# EAGLE board Cansat2019_1516_PayloadB_v6 (EAGLE 7.3.0)
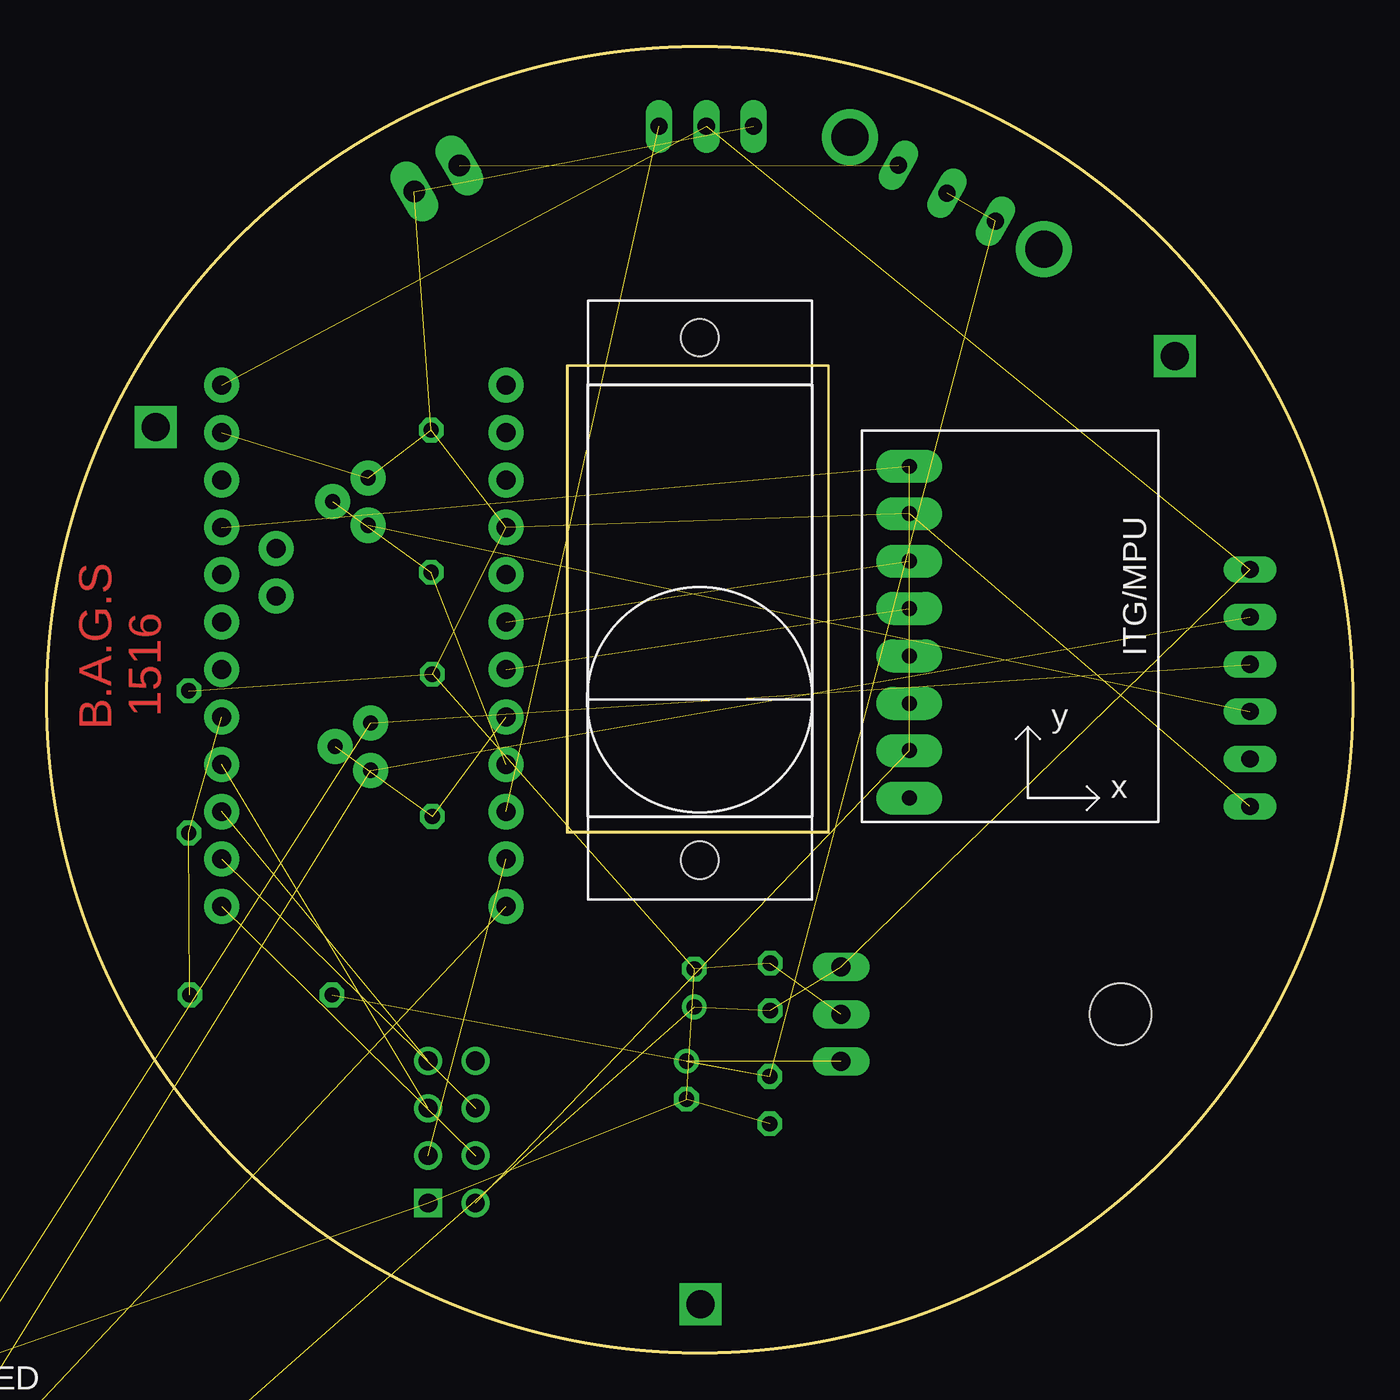
[diagram p0: board, top side]
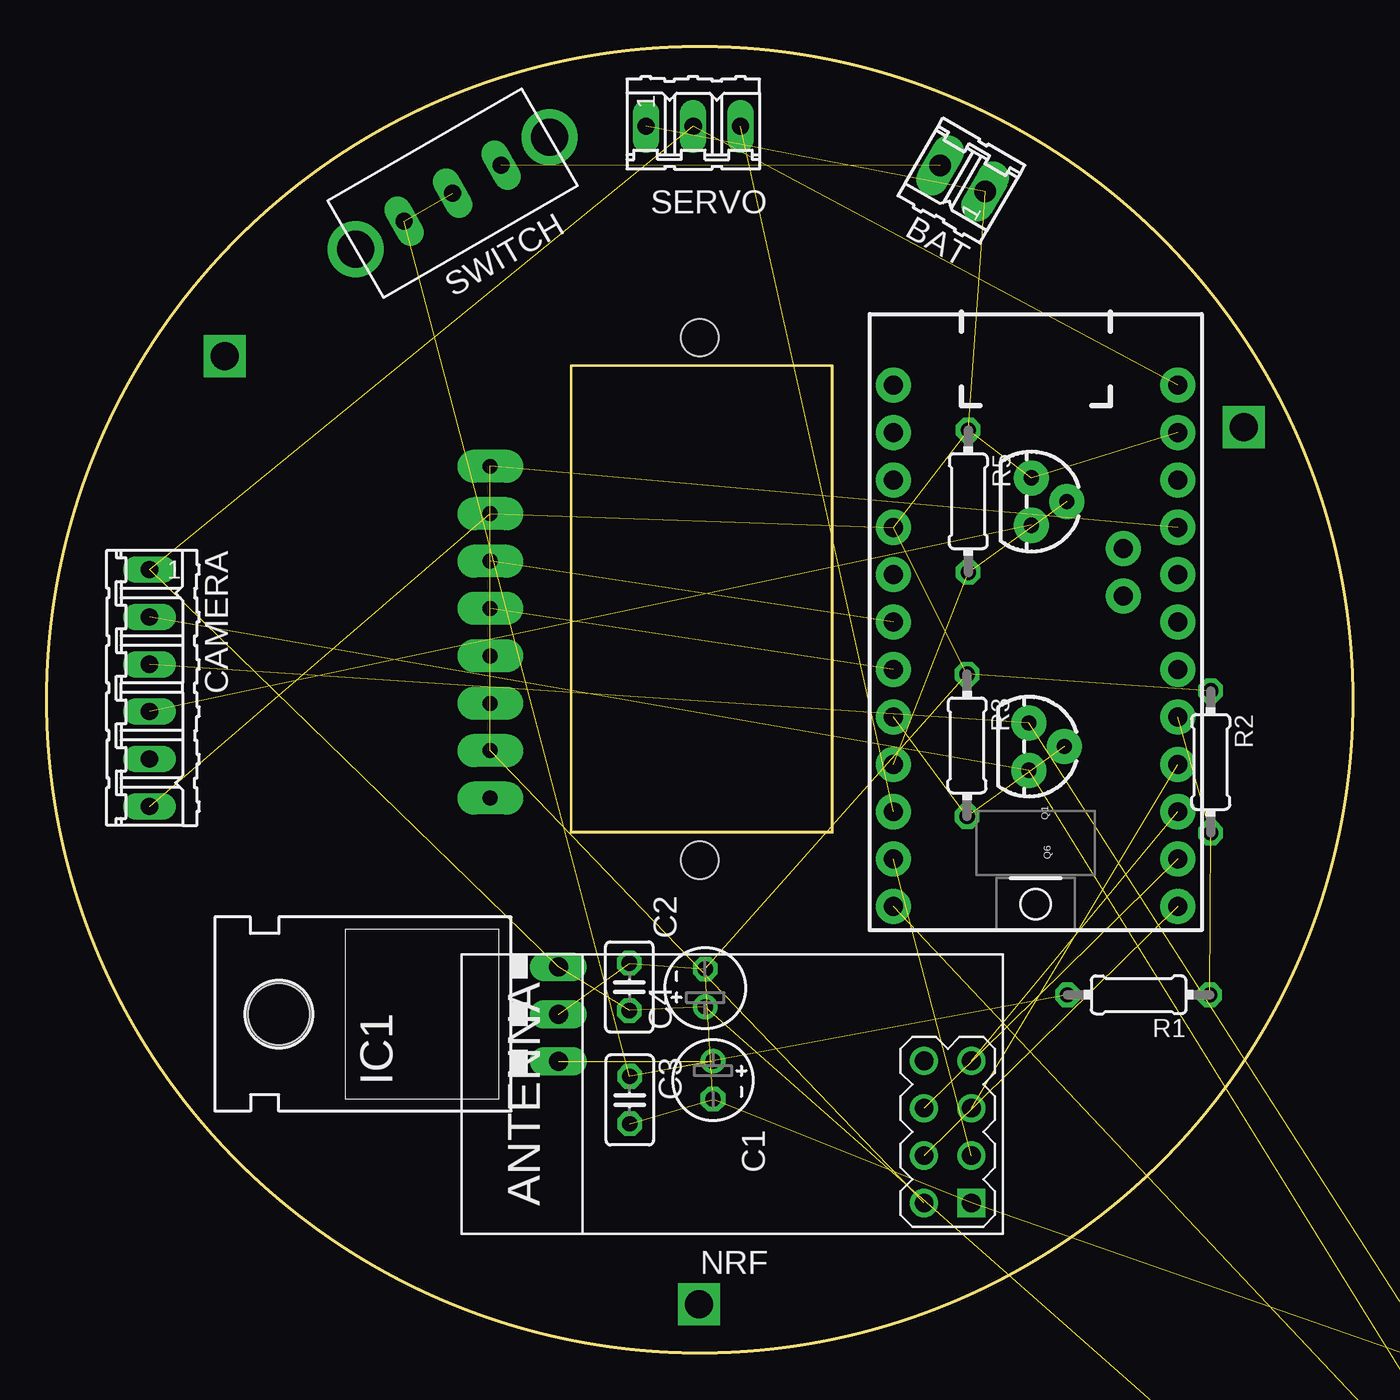
[diagram p1: board, bottom side, seen from below]

Size 70 x 70 mm. Coordinates in mm from the lower left corner, seen from the top.
Outline: circle at 35,35 radius 35
Copper layers (1*16): Top 0.035mm / dielectric 1.5mm / Bottom 0.035mm
Design rules "default": minimum track width 10mil, minimum drill 24mil, track to track 8mil, track to pad 8mil, pad to pad 8mil, via to via 8mil, smd to smd 8mil, copper to edge 40mil, drill to drill 8mil, minimum pad ring 10mil, minimum via ring 8mil, stop-mask expansion 4mil, vias tented up to drill 0mil, thermal gap 10mil
Net classes: 0 default: width 0.305 mm; 1 power: width 0.61 mm, clearance 0.305 mm; 2 power_main: width 0.813 mm, clearance 0.356 mm
Milling: area 27.9,27.9 to 41.9,52.9

## Footprints (pad centres in the part's own frame; a part is rotated, then mirrored left to right if it is on the bottom)
02P = drill 1.143 long: 1 -1.397,0; 2 1.397,0
E2-4 = drill 0.813 pad 1.27: + -1.016,0 | drill 0.813 pad 1.27 octagon: - 1.016,0
C025-025X050 = drill 0.813 octagon: 1 -1.27,0; 2 1.27,0
06P = drill 0.914 long: 1 -6.35,0; 2 -3.81,0; 3 -1.27,0; 4 1.27,0; 5 3.81,0; 6 6.35,0
LED3MM = drill 0.813 pad 1.676 octagon: A -1.27,0; K 1.27,0
TO-220-ALT = drill 1.016 long: GND 0,-3.81; IN -2.54,-3.81; OUT 2.54,-3.81 | hole 3.302: 0,11.176
GY-521 = drill 0.8 pad 1.778 long: ADO -8.89,-6.35; GND -8.89,6.35; INT -8.89,-8.89; SCL -8.89,3.81; SDA -8.89,1.27; VCC -8.89,8.89; XCL -8.89,-3.81; XDA -8.89,-1.27
WIRELESS-NRF24L01 = drill 1 square: 1 -12.7,6.35 | drill 1: 2 -10.16,6.35; 3 -12.7,3.81; 4 -10.16,3.81; 5 -12.7,1.27; 6 -10.16,1.27; 7 -12.7,-1.27; 8 -10.16,-1.27
TO-92 = drill 0.813 pad 1.88: 1 -1.27,0; 2 0,1.905; 3 1.27,0
0204/7 = drill 0.813 octagon: 1 -3.81,0; 2 3.81,0
03P = drill 0.914 long: 1 -2.54,0; 2 0,0; 3 2.54,0
BIGSWITCH = drill 0.9 long: 1 -3,0; 2 0,0; 3 3,0 | drill 2 pad 2.184: TAB1 -6,0; TAB2 6,0
SG90_TOP = hole 2: 4.1,26.5; 4.1,-1.5
JP1_SPARKFUN-SAMD21-MINI-BREAKOUT-V10 = drill 1.016 pad 1.88: 1@JP1 1.27,29.21; 1@JP2 16.51,29.21; 1@JP4 13.589,20.447; 2@JP1 1.27,26.67; 2@JP2 16.51,26.67; 2@JP4 13.589,17.907; 3@JP1 1.27,24.13; 3@JP2 16.51,24.13; 4@JP1 1.27,21.59; 4@JP2 16.51,21.59; 5@JP1 1.27,19.05; 5@JP2 16.51,19.05; 6@JP1 1.27,16.51; 6@JP2 16.51,16.51; 7@JP1 1.27,13.97; 7@JP2 16.51,13.97; 8@JP1 1.27,11.43; 8@JP2 16.51,11.43; 9@JP1 1.27,8.89; 9@JP2 16.51,8.89; 10@JP1 1.27,6.35; 10@JP2 16.51,6.35; 11@JP1 1.27,3.81; 11@JP2 16.51,3.81; 12@JP1 1.27,1.27; 12@JP2 16.51,1.27

## Placement (x,y rotation side)
BAT  [02P]  20.91,62.93 150 bottom
C1  10u  [E2-4]  34.29,14.61 270 bottom
C2  10u  [E2-4]  34.71,19.55 90 bottom
C3  0.1u  [C025-025X050]  38.75,13.55 270 bottom
C4  0.1u  [C025-025X050]  38.77,19.61 90 bottom
CAMERA  [06P]  64.49,35.63 270 bottom
DBG_LED  [LED3MM]  -10.62,-2.35 0 top  (outside the outline)
IC1  [TO-220-ALT]  46.38,18.15 90 bottom
MPU  GY-521MPU6050  [GY-521]  55.12,38.62 0 top
NRF  WIRELESS-NRF24L01  [WIRELESS-NRF24L01]  33.14,14.38 180 bottom
Q1  MOSFET-NCHANNEL2N7000  [TO-92]  17.36,32.49 270 bottom
Q2  MOSFET-NCHANNEL2N7000  [TO-92]  -10.62,-11.85 0 top  (outside the outline)
Q3  MOSFET-NCHANNEL2N7000  [TO-92]  -10.62,-20.85 0 top  (outside the outline)
Q6  MOSFET-NCHANNEL2N7000  [TO-92]  17.23,45.62 270 bottom
R1  10k  [0204/7]  11.48,19.19 180 bottom
R2  10k  [0204/7]  7.62,31.67 270 bottom
R3  10k  [0204/7]  20.67,32.56 270 bottom
R4  10k  [0204/7]  -8.62,-16.35 0 top  (outside the outline)
R5  10k  [0204/7]  20.61,45.64 270 bottom
R6  10k  [0204/7]  -8.62,-25.35 0 top  (outside the outline)
R10  1k  [0204/7]  -8.62,-7.35 0 top  (outside the outline)
SERVO  [03P]  35.35,65.73 0 bottom
SWITCH  SLIDESWITCH-BIG  [BIGSWITCH]  48.25,62.15 30 bottom
U$1  [SG90_TOP]  30.9,27.9 0 top
U$2  [JP1_SPARKFUN-SAMD21-MINI-BREAKOUT-V10]  25.88,22.65 0 bottom

## Library data of the parts
BAT SWITCH = CEDT_JANUARY_2015_v5
C1-C4 R1-R6 R10 = rcl
CAMERA SERVO = con-amp-quick; OC_FARNELL: unknown; OC_NEWARK: unknown
DBG_LED = 01_adafruit
IC1 = SparkFun-PowerIC
MPU = gy-521
NRF = diy-modules
Q1-Q3 Q6 = SparkFun-DiscreteSemi
U$1 = servo90
U$2 = SparkFun-SAMD21-Mini-Breakout

## Nets
!POWER: Q3.2 R6.2
AREF: U$2.3@JP2
BAT_VOL: R1.1 R2.2 U$2.8@JP2
CE: NRF.3 U$2.11@JP1
CSN: NRF.4 U$2.12@JP2
DBG_LED: R10.2 U$2.12@JP1
GND [power]: BAT.1 C1.- C2.- C3.2 C4.2 CAMERA.6 DBG_LED.K IC1.GND MPU.GND NRF.1 Q3.1 Q6.1 R2.1 R3.1 R5.1 R6.1 SERVO.1 U$2.2@JP2 U$2.4@JP1
INTR: NRF.8
MISO: NRF.7 U$2.10@JP2
MODE [power]: Q6.2 R5.2 U$2.9@JP1
MODE_O: CAMERA.4 Q6.3
MOSI: NRF.6 U$2.11@JP2
N$1 [power_main]: BAT.2 SWITCH.3
N$5: Q2.2 Q3.3 R4.1
N$15: DBG_LED.A R10.1
POWER: Q1.2 R3.2 U$2.8@JP1
POWER_OH: CAMERA.2 Q1.3 Q2.3
POWER_OL: CAMERA.3 Q1.1 Q2.1
SCK: NRF.5 U$2.9@JP2
SCL: MPU.SCL U$2.6@JP1
SDA: MPU.SDA U$2.7@JP1
SERVO: SERVO.3 U$2.10@JP1
V5 [power]: C2.+ C4.1 CAMERA.1 IC1.OUT R4.2 SERVO.2 U$2.1@JP2
V33 [power]: MPU.ADO MPU.VCC NRF.2 U$2.4@JP2
VBAT [power_main]: C1.+ C3.1 IC1.IN R1.2 SWITCH.1 SWITCH.2

## Tracks (layer width: path | path; a pad name or v marks a point on that pad's centre or on a via)
!POWER  (1 unrouted)
BAT_VOL  (2 unrouted)
CE  (1 unrouted)
CSN  (1 unrouted)
DBG_LED  (1 unrouted)
GND  (18 unrouted)
MISO  (1 unrouted)
MODE  (2 unrouted)
MODE_O  (1 unrouted)
MOSI  (1 unrouted)
N$1  (1 unrouted)
N$2  (via drill 1.5 pad 2.25)
  other vias: 35.05,2.61
N$3  (via drill 1.5 pad 2.25)
  other vias: 60.45,53.41
N$4  (via drill 1.5 pad 2.25)
  other vias: 5.84,49.6
N$5  (2 unrouted)
N$15  (1 unrouted)
POWER  (2 unrouted)
POWER_OH  (2 unrouted)
POWER_OL  (2 unrouted)
SCK  (1 unrouted)
SCL  (1 unrouted)
SDA  (1 unrouted)
SERVO  (1 unrouted)
V5  (6 unrouted)
V33  (3 unrouted)
VBAT  (5 unrouted)

## Text on the board
Top: B.A.G.S / 1516
tStop: B.A.G.S / 1516